# EAGLE board 15_MOV8_New (EAGLE 7.5.0)
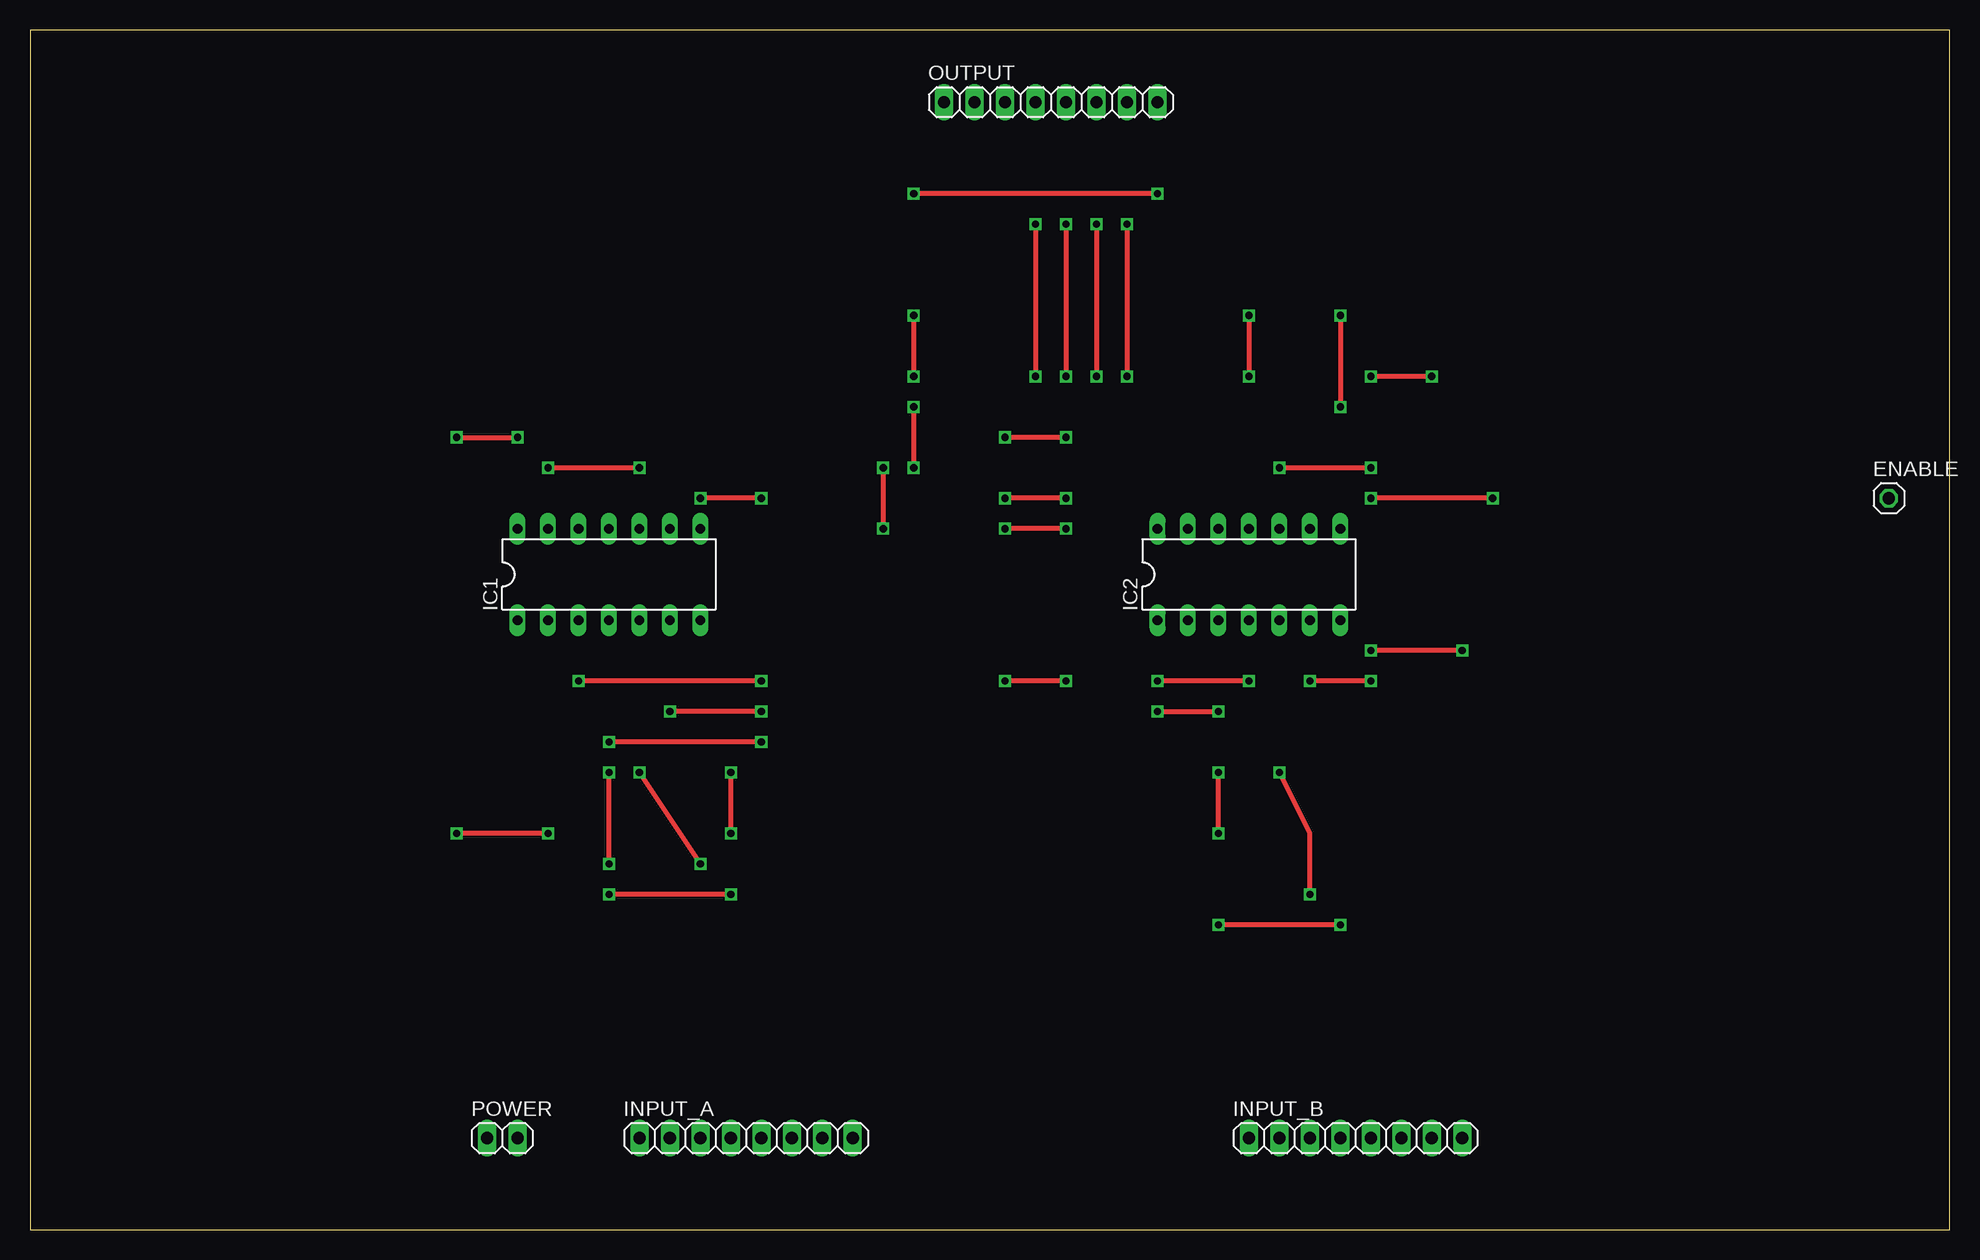
[diagram p0: board, top side]
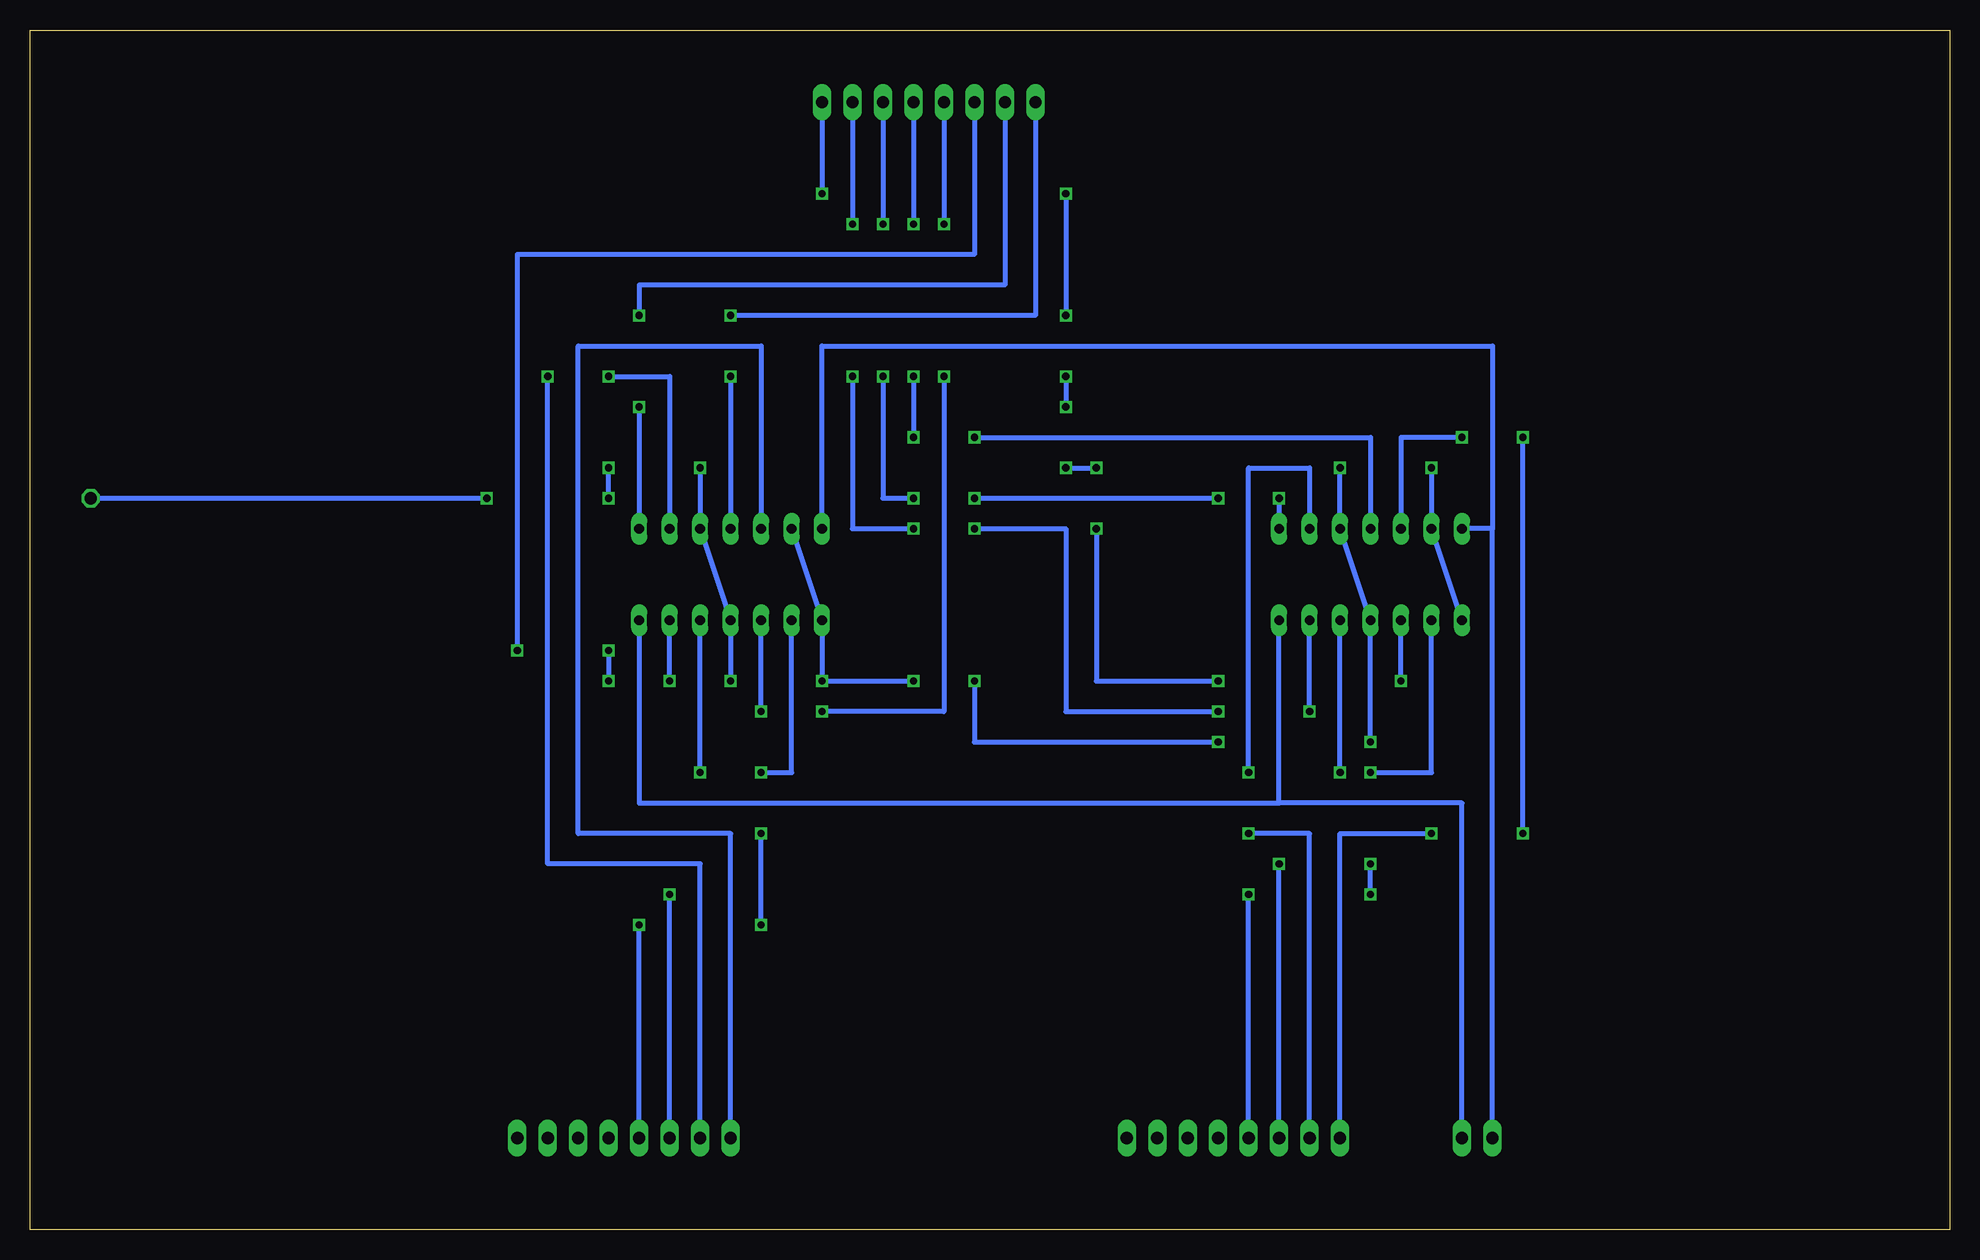
[diagram p1: board, bottom side, seen from below]

Size 160 x 100 mm. Coordinates in mm from the lower left corner, seen from the top.
Outline: 0,0 160,0 160,100 0,100 0,0
Copper layers (1*16): Top 0.035mm / dielectric 1.5mm / Bottom 0.035mm
Design rules "default": minimum track width 10mil, minimum drill 24mil, track to track 8mil, track to pad 8mil, pad to pad 8mil, via to via 8mil, smd to smd 8mil, copper to edge 40mil, drill to drill 8mil, minimum pad ring 10mil, minimum via ring 8mil, stop-mask expansion 4mil, vias tented up to drill 0mil, thermal gap 10mil

## Footprints (pad centres in the part's own frame; a part is rotated, then mirrored left to right if it is on the bottom)
1X01 = drill 1.016 octagon: 1 0,0
DIL14 = drill 0.813 long: 1 -7.62,-3.81; 2 -5.08,-3.81; 3 -2.54,-3.81; 4 0,-3.81; 5 2.54,-3.81; 6 5.08,-3.81; 7 7.62,-3.81; 8 7.62,3.81; 9 5.08,3.81; 10 2.54,3.81; 11 0,3.81; 12 -2.54,3.81; 13 -5.08,3.81; 14 -7.62,3.81
1X08 = drill 1.016 long: 1 -8.89,0; 2 -6.35,0; 3 -3.81,0; 4 -1.27,0; 5 1.27,0; 6 3.81,0; 7 6.35,0; 8 8.89,0
1X02 = drill 1.016 long: 1 -1.27,0; 2 1.27,0

## Placement (x,y rotation side)
ENABLE  [1X01]  154.94,60.96 0 top
IC1  74LS126N  [DIL14]  48.26,54.61 0 top
IC2  74LS126N  [DIL14]  101.6,54.61 0 top
INPUT_A  [1X08]  59.69,7.62 0 top
INPUT_B  [1X08]  110.49,7.62 0 top
OUTPUT  [1X08]  85.09,93.98 0 top
POWER  [1X02]  39.37,7.62 0 top

## Library data of the parts
ENABLE INPUT_A INPUT_B OUTPUT POWER = pinhead
IC1 IC2 = 74xx-eu

## Nets
GND: IC1.7 IC2.7 POWER.2
N$1: IC1.3 OUTPUT.8
N$2: IC1.6 OUTPUT.7
N$3: IC1.8 OUTPUT.6
N$4: IC1.11 OUTPUT.5
N$5: IC2.3 OUTPUT.4
N$6: IC2.6 OUTPUT.3
N$7: IC2.8 OUTPUT.2
N$8: IC2.11 OUTPUT.1
N$9: IC1.12 INPUT_A.1
N$10: IC1.9 INPUT_A.2
N$11: IC1.5 INPUT_A.3
N$12: IC1.2 INPUT_A.4
N$13: IC2.12 INPUT_B.1
N$14: IC2.9 INPUT_B.2
N$15: IC2.5 INPUT_B.3
N$16: IC2.2 INPUT_B.4
N$17: ENABLE.1 IC1.1 IC1.4 IC1.10 IC1.13 IC2.1 IC2.4 IC2.10 IC2.13
VCC: IC1.14 IC2.14 POWER.1

## Tracks (layer width: path | path; a pad name or v marks a point on that pad's centre or on a via)
GND
  Bottom 0.406: POWER.2 40.64,35.56 55.88,35.56 | 55.88,35.56 IC1.7 | IC2.7 109.22,35.56 55.88,35.56
N$1  (via drill 0.6)
  Top 0.406: v93.98,86.36 v73.66,86.36 | v73.66,76.2 v73.66,71.12 | v73.66,68.58 v73.66,63.5 | v71.12,63.5 v71.12,58.42 | v60.96,45.72 v45.72,45.72
  Bottom 0.406: OUTPUT.8 v93.98,86.36 | v73.66,86.36 v73.66,76.2 | v73.66,71.12 v73.66,68.58 | v73.66,63.5 v71.12,63.5 | v71.12,58.42 71.12,45.72 v60.96,45.72 | v45.72,45.72 IC1.3
N$2  (via drill 0.6)
  Top 0.406: v91.44,83.82 v91.44,71.12 | v86.36,58.42 v81.28,58.42 | v60.96,43.18 v53.34,43.18
  Bottom 0.406: OUTPUT.7 v91.44,83.82 | v91.44,71.12 91.44,58.42 v86.36,58.42 | v81.28,58.42 73.66,58.42 73.66,43.18 v60.96,43.18 | v53.34,43.18 IC1.6
N$3  (via drill 0.6)
  Top 0.406: v88.9,83.82 v88.9,71.12 | v86.36,60.96 v81.28,60.96 | v60.96,60.96 v55.88,60.96
  Bottom 0.406: OUTPUT.6 v88.9,83.82 | v88.9,71.12 88.9,60.96 v86.36,60.96 | v81.28,60.96 v60.96,60.96 | v55.88,60.96 IC1.8
N$4  (via drill 0.6)
  Top 0.406: v86.36,83.82 v86.36,71.12 | v86.36,66.04 v81.28,66.04
  Bottom 0.406: OUTPUT.5 v86.36,83.82 | v86.36,71.12 v86.36,66.04 | v81.28,66.04 48.26,66.04 IC1.11
N$5  (via drill 0.6)
  Top 0.406: v83.82,83.82 v83.82,71.12 | v93.98,43.18 v99.06,43.18
  Bottom 0.406: OUTPUT.4 v83.82,83.82 | v83.82,71.12 83.82,43.18 v93.98,43.18 | v99.06,43.18 IC2.3
N$6  (via drill 0.6)
  Top 0.406: v119.38,48.26 v111.76,48.26 | v111.76,45.72 v106.68,45.72
  Bottom 0.406: OUTPUT.3 81.28,81.28 119.38,81.28 v119.38,48.26 | v111.76,48.26 v111.76,45.72 | v106.68,45.72 IC2.6
N$7  (via drill 0.6)
  Top 0.406: v109.22,76.2 v109.22,68.58
  Bottom 0.406: OUTPUT.2 78.74,78.74 109.22,78.74 v109.22,76.2 | v109.22,68.58 IC2.8
N$8  (via drill 0.6)
  Top 0.406: v101.6,76.2 v101.6,71.12
  Bottom 0.406: OUTPUT.1 76.2,76.2 v101.6,76.2 | v101.6,71.12 IC2.11
N$9  (via drill 0.6)
  Top 0.406: v43.18,33.02 v35.56,33.02 | v35.56,66.04 v40.64,66.04
  Bottom 0.406: INPUT_A.1 50.8,33.02 v43.18,33.02 | v35.56,33.02 v35.56,66.04 | v40.64,66.04 45.72,66.04 IC1.12
N$10  (via drill 0.6)
  Top 0.406: v58.42,33.02 v58.42,38.1
  Bottom 0.406: INPUT_A.2 53.34,33.02 v58.42,33.02 | v58.42,38.1 58.42,63.5 53.34,63.5 IC1.9
N$11  (via drill 0.6)
  Top 0.406: v55.88,30.48 v50.8,38.1
  Bottom 0.406: INPUT_A.3 v55.88,30.48 | v50.8,38.1 IC1.5
N$12  (via drill 0.6)
  Top 0.406: v58.42,27.94 v48.26,27.94 | v48.26,30.48 v48.26,38.1
  Bottom 0.406: INPUT_A.4 v58.42,27.94 | v48.26,27.94 v48.26,30.48 | v48.26,38.1 43.18,38.1 IC1.2
N$13
  Bottom 0.406: INPUT_B.1 101.6,33.02 114.3,33.02 114.3,73.66 99.06,73.66 IC2.12
N$14  (via drill 0.6)
  Top 0.406: v116.84,71.12 v111.76,71.12
  Bottom 0.406: INPUT_B.2 104.14,30.48 116.84,30.48 v116.84,71.12 | v111.76,71.12 106.68,71.12 IC2.9
N$15  (via drill 0.6)
  Top 0.406: v106.68,27.94 106.68,33.02 v104.14,38.1
  Bottom 0.406: INPUT_B.3 v106.68,27.94 | v104.14,38.1 IC2.5
N$16  (via drill 0.6)
  Top 0.406: v109.22,25.4 v99.06,25.4 | v99.06,33.02 v99.06,38.1
  Bottom 0.406: INPUT_B.4 v109.22,25.4 | v99.06,25.4 v99.06,33.02 | v99.06,38.1 96.52,38.1 IC2.2
N$17  (via drill 0.6)
  Top 0.406: v121.92,60.96 v111.76,60.96 | v111.76,63.5 v104.14,63.5 | v101.6,45.72 v93.98,45.72 | v86.36,45.72 v81.28,45.72 | v60.96,40.64 v48.26,40.64 | v50.8,63.5 v43.18,63.5
  Bottom 0.406: ENABLE.1 v121.92,60.96 | v111.76,60.96 v111.76,63.5 | v104.14,63.5 IC2.10 IC2.4 v101.6,45.72 | v86.36,45.72 v93.98,45.72 IC2.1 IC2.13 | v81.28,45.72 81.28,40.64 v60.96,40.64 | v48.26,40.64 IC1.4 IC1.10 v50.8,63.5 | v43.18,63.5 IC1.13 IC1.1
VCC
  Bottom 0.406: POWER.1 38.1,58.42 | 38.1,58.42 IC1.14 | IC2.14 93.98,73.66 38.1,73.66 38.1,58.42